# Altium PCB uku20710_face.PcbDoc
Units mm, origin at the board's own origin, x right, y up, seen from the top; angles counter-clockwise.
Board outline 354.7 x 156.7 mm, 2 copper layers (Top Layer, Bottom Layer); 59 components, 530 nets, 280 pads, 80 vias.
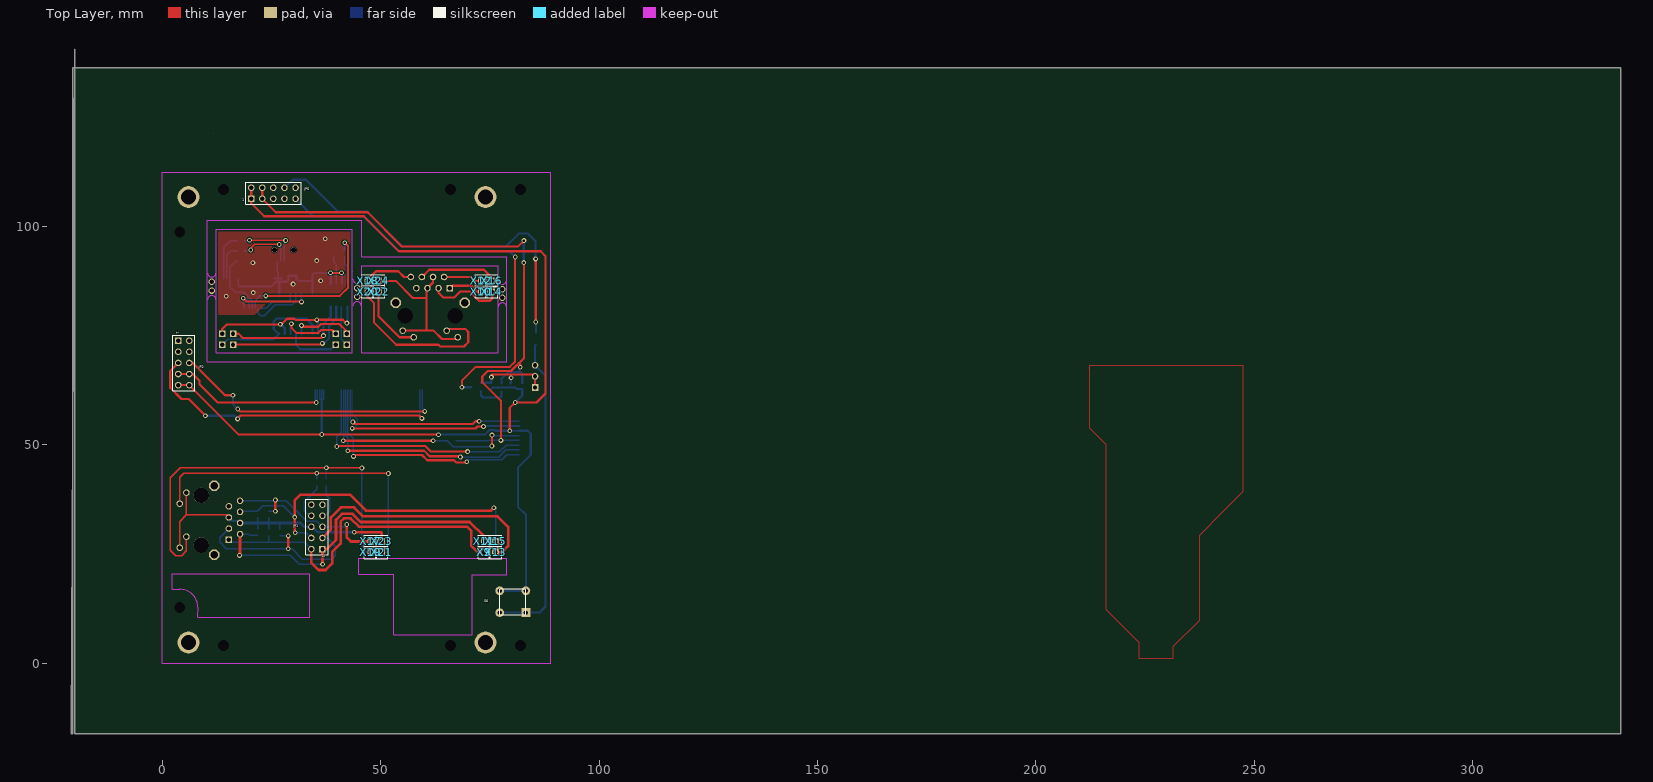
[diagram p0: Top Layer view]
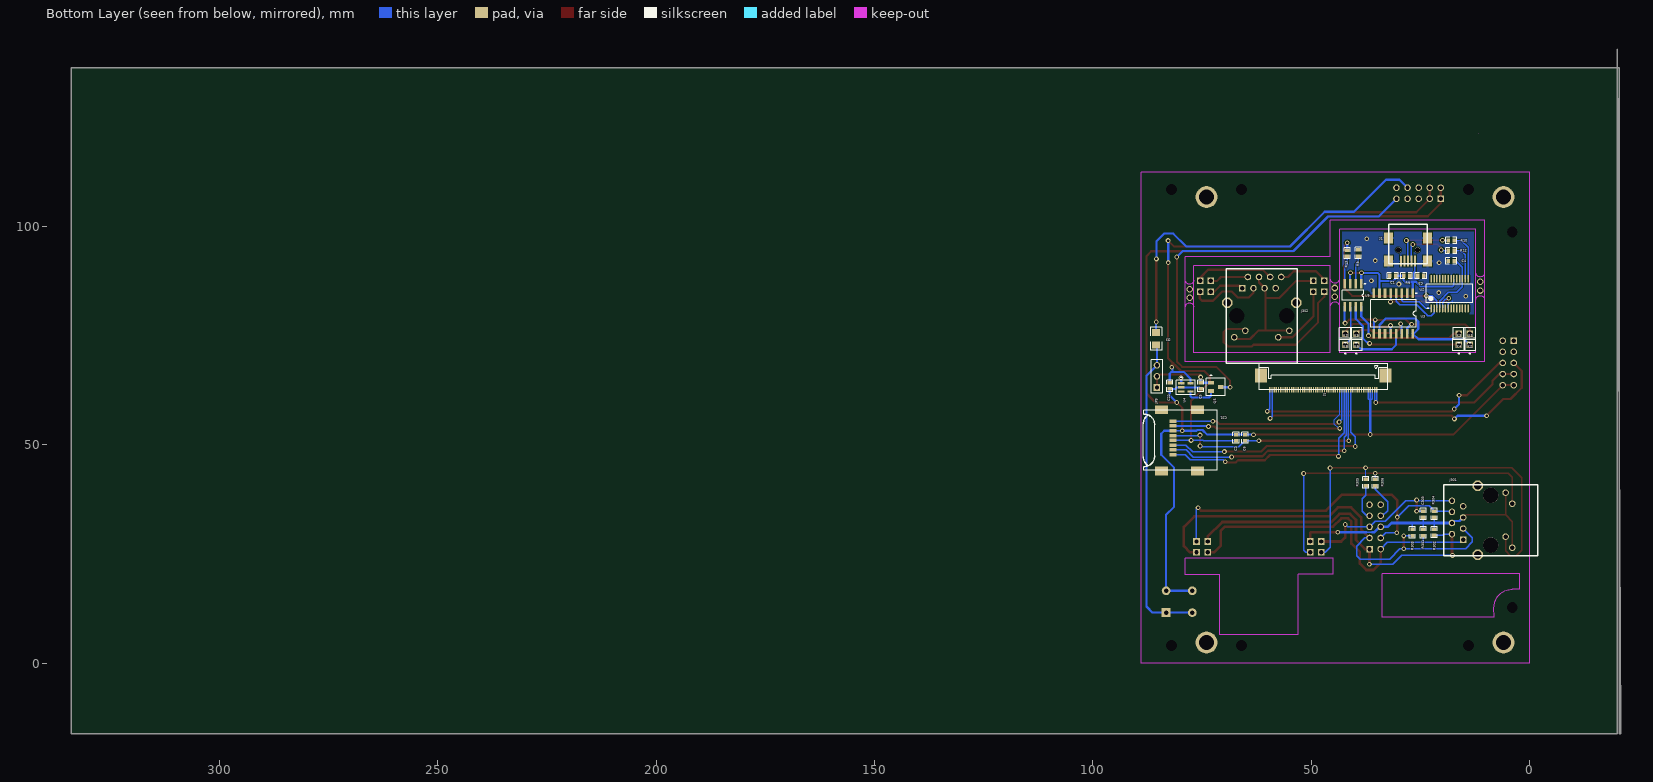
[diagram p1: Bottom Layer view, seen from below]

## Layer stack, top to bottom
Top Layer: signal copper 0.0356
Dielectric: dielectric 0.32, FR-4, Dk 4.8
Bottom Layer: signal copper 0.0356

## Board outline
-20.1,140.5 -20.1,-16.2 333.9,-16.2 333.9,136.35 -20.45,136.35 -20.45,-16.2 -20.8,-16.2

## Design rules (kind name [scope] priority, off if disabled: settings)
Clearance Keep_out_usb [OnLayer('Keep-Out Layer') vs InPoly and InNet(GND_USB)] p1: gap=0.3
Clearance Keep_out_poly [OnLayer('Keep-Out Layer') vs InPoly] p2: gap=1
Clearance Holes [InPoly vs HasPad('Free-0') Or HasPad('Free-1') Or HasPad('Free-2') Or HasPad('Free-3')] p3: gap=2
Clearance Keep_Out [OnLayer('Keep-Out Layer')] p4: gap=0.45
Clearance "Для разъёма и индикатора" [InComponent(JP5) or InComponent(U2)] p5: gap=0.3
Clearance [All] p6: gap=0.2
ComponentClearance [All] p1: gap=0.254 collisioncheckmode=0
HoleSize [All] p1: absolutevalues=TRUE maxlimit=5 minlimit=0.025 maxpercent=80.000 minpercent=20.000
PolygonConnect [InComponent(J1) and HasPad('J1-5')  or InComponent(U2)] p1: connectstyle=Relief reliefconductorwidth=0.3 reliefentries=4 polygonreliefangle="90 Angle"
PolygonConnect PolygonConnect_1 [All] p2: connectstyle=Relief reliefconductorwidth=0.5 reliefentries=4 polygonreliefangle="90 Angle"
RoutingLayers [All] p1: top layer=Horizontal bottom layer=Vertical
RoutingVias [All] p1: holewidth=0.7 width=1.2 viastyle="Through Hole" minholewidth=0.6 minwidth=1.1 maxholewidth=0.7 maxwidth=1.2
SolderMaskExpansion [All] p1: expansion=0.102
TestPointUsage [All] p1: valid=0 allowmultiple=FALSE
Testpoint [All] p1: side=15 testpointundercomponent=TRUE minsize=1.016 maxsize=2.54 preferedsize=1.524 minholesize=0 maxholesize=1.016 preferedholesize=0.813 testpointgrid=0.025 style=1023 order=1234567890
Width [All] p1: maxlimit=2 minlimit=0.2 preferedwidth=0.254 toplayer_prefwidth=0.5 bottomlayer_prefwidth=0.5 minimp=50.000000 maximp=50.000000 favimp=50.000000
15 further rules are at their usual default settings.

## Classes and differential pairs
component class USB: C1 C3 C4 J1 R8 R9 R10 R12 R13 U2 U3 U5 X1 X2 X3 X4 X5 X6 X7 X8
component class uku206: A? BT? C2 C5 C6 C22 CS1 D3 J2 JP2 JP5 JP9 Q5 S6 U4 UU1 UU3 UU5 UU7 UU9
component class LAN: C303 J301 J302 JP1 R301 R302 R303 R304 R305 R306 X9 X10 X11 X12 X13 X14 X15 X16 X17 X18 X19 X20 X21 X22 X23 X24

## Components (designator, comment, footprint, x,y, rotation, side; value= is the part's Value field where it differs from the comment)
C1 "1.0" _0603 31.375,88.7 r180 bottom
C2 "1.0" _0603 67.25,51.6 r270 bottom
C3 "1.0" _0603 24.925,88.65 r0 bottom
C4 "1.0" _0603 17.975,92.05 r180 bottom
C5 "1.0" _0603 75.325,63.475 r90 bottom
C6 "22pF" _0603 65.2,51.6 r270 bottom
C22 "1.0" _0603 82.425,63.475 r270 bottom (schematic designator C?)
C303 "0.1" _0603 24.4,34.1 r270 bottom
CS1 "MICROSD-ADAPTER" microsd_2 81.75,51 r270 bottom
D3 "LL4148" _1206d 85.55,74.25 r90 bottom
J1 "miniUSB" USBmini 27.875,100.45 r0 bottom
J2 "Edge Con 50" FH12-50 35,62.55 r0 bottom
J301 "J0011D21B" J0011D21B#1 8.902,32.708 r270 bottom
J302 "J0011D21B" J0011D21B#2 61.35,79.5 r0 bottom
JP1 "Header 10H" HDR2X5 36.676,26.1 r90 top
JP2 "PBD-10" HDR2X5 3.65,73.8 r270 top
JP5 "PLHD-20" HDR2X5 20.35,106.3 r0 top
JP9 "PLS-3" HDR1X3 85.35,63.1 r90 bottom
Q5 "IRLML2402" SO-G3 71.875,63.225 r270 bottom (schematic designator Q?)
R8 "200R" _0603 39.225,93.9 r270 bottom (schematic designator R?)
R9 "1R" _0603 28.175,88.7 r0 bottom
R10 "20R" _0603 17.975,96.75 r180 bottom
R12 "20R" _0603 17.975,94.45 r180 bottom
R13 "200R" _0603 41.775,93.85 r270 bottom
R301 "51R" _0603 24.4,29.9 r90 bottom
R302 "51R" _0603 21.85,29.95 r270 bottom
R303 "51R" _0603 26.85,29.9 r90 bottom
R304 "51R" _0603 21.85,34.1 r90 bottom
R305 "K10" _0603 37.55,41.35 r270 bottom
R306 "K10" _0603 35.35,41.35 r270 bottom
S6 "SWT-6" SWT-6 83.25,11.55 r180 top
U2 "FT232R" SOP65P780-28L 18.325,84.6 r90 bottom
U3 "ISO7231" SO-G16/D10.4 31.225,80.05 r0 bottom
U4 "TPS3823" SO-G5/P.95 78.725,63.125 r270 bottom (schematic designator U?)
U5 "MOCD217" SO-G8 40.475,84.2 r0 bottom
X1 "" PIN1#1 13.7,75.425 r0 bottom
X2 "" PIN1#1 13.7,72.925 r0 bottom
X3 "" PIN1#1 16.2,75.425 r0 bottom
X4 "" PIN1#1 16.2,72.925 r0 bottom
X5 "" PIN1#1 39.7,75.425 r0 bottom
X6 "" PIN1#1 39.7,72.925 r0 bottom
X7 "" PIN1#1 42.2,75.425 r0 bottom
X8 "" PIN1#1 42.2,72.925 r0 bottom
X9 "" PIN1#2 73.75,25.325 r90 top
X10 "" PIN1#2 73.05,85 r0 top
X11 "" PIN1#2 73.75,27.825 r90 top
X12 "" PIN1#2 73.025,87.5 r0 top
X13 "" PIN1#2 76.3,25.325 r90 top
X14 "" PIN1#2 75.45,85 r0 top
X15 "" PIN1#2 76.3,27.825 r90 top
X16 "" PIN1#2 75.45,87.505 r0 top
X17 "" PIN1#2 47.7,27.825 r90 top
X18 "" PIN1#2 47.025,87.55 r0 top
X19 "" PIN1#2 47.7,25.325 r90 top
X20 "" PIN1#2 47.02,85.062 r0 top
X21 "" PIN1#2 50.25,25.325 r90 top
X22 "" PIN1#2 49.525,85.05 r90 top
X23 "" PIN1#2 50.25,27.825 r90 top
X24 "" PIN1#2 49.5,87.5 r0 top

## Footprints (in the part's own frame and the unit in brackets; to place one, negate y for a bottom-side part, rotate by r counter-clockwise, add the part's x,y. Pads: shape width x height; smd on the part's side, far side on the other; paste and mask are expansions set on the pad)
_0603 [mm]
  rect 0.8x1 smd: 1(-0.7,0) 2(0.7,0)
  silkscreen extent -1.3,-0.7 1.3,0.7
_1206d [mm]
  rect 1.6x1.8 smd: 1(1.405,0.012) 2(-1.395,0.012)
  silkscreen extent -2.6,-1.29 2.6,1.31
FH12-50 [mm]
  rect 2.8x3.2 smd: 0(-2,-3.25) 0(26.5,-3.25)
  rect 0.3x1.3 smd: 1(0,0) 2(0.5,0) 3(1,0) 4(1.5,0) 5(2,0) 6(2.5,0) 7(3,0) 8(3.5,0) 9(4,0) 10(4.5,0) 11(5,0) 12(5.5,0) 13(6,0) 14(6.5,0) 15(7,0) 16(7.5,0) 17(8,0) 18(8.5,0) 19(9,0) 20(9.5,0) 21(10,0) 22(10.5,0) 23(11,0) 24(11.5,0) 25(12,0) 26(12.5,0) 27(13,0) 28(13.5,0) 29(14,0) 30(14.5,0) 31(15,0) 32(15.5,0) 33(16,0) 34(16.5,0) 35(17,0) 36(17.5,0) 37(18,0) 38(18.5,0) 39(19,0) 40(19.5,0) 41(20,0) 42(20.5,0) 43(21,0) 44(21.5,0) 45(22,0) 46(22.5,0) 47(23,0) 48(23.5,0) 49(24,0) 50(24.5,0)
  silkscreen extent -2.55,-6.02 27.05,0
HDR1X3 [mm]
  rect 1.5x1.5 hole 1: 1(0,0)
  round 1.5 hole 1: 2(2.54,0) 3(5.08,0)
  silkscreen extent -1.27,-1.27 6.35,1.27
HDR2X5 [mm]
  rect 1.5x1.5 hole 1: 1(0,0)
  round 1.5 hole 1: 2(0,2.54) 3(2.54,0) 4(2.54,2.54) 5(5.08,0) 6(5.08,2.54) 7(7.62,0) 8(7.62,2.54) 9(10.16,0) 10(10.16,2.54)
  silkscreen extent -1.27,-1.27 11.43,3.81
J0011D21B#1 [mm]
  round 2.5 hole 1.8: 0(-7.9,-3) 0(7.9,-3)
  round 3.5 hole 3.5: 0(-5.7,0) 0(5.7,0)
  rect 1.5x1.5 hole 1: 1(4.445,-6.35)
  round 1.5 hole 1: 2(3.175,-8.9) 3(1.905,-6.35) 4(0.635,-8.9) 5(-0.635,-6.35) 6(-1.905,-8.9) 7(-3.175,-6.35) 8(-4.445,-8.9) 9(6.31,4.9) 10(3.77,3.38) 11(-3.8,4.9) 12(-6.31,3.38)
  silkscreen extent -8.1,-10.8 8.1,10.8
J0011D21B#2 [mm]
  round 2.5 hole 1.8: 0(-7.9,-3) 0(7.9,-3)
  round 1.5 hole 3.5: 0(-5.7,0) 0(5.7,0)
  rect 1.5x1.5 hole 1: 1(4.445,-6.35)
  round 1.5 hole 1: 2(3.175,-8.9) 3(1.905,-6.35) 4(0.635,-8.9) 5(-0.635,-6.35) 6(-1.905,-8.9) 7(-3.175,-6.35) 8(-4.445,-8.9) 9(6.31,4.9) 10(3.77,3.38) 11(-3.8,4.9) 12(-6.31,3.38)
  silkscreen extent -8.1,-10.8 8.1,10.8
microsd_2 [mm]
  rect 2x3 smd: 0(-7,-2.6) 0(-7,5.7) 0(7,-2.6) 0(7,5.7)
  rect 0.8x1.6 smd: 1(3.306,0.03) 2(2.206,0.03) 3(1.105,0.03) 4(0.005,0.03) 5(-1.095,0.03) 6(-2.194,0.03) 7(-3.294,0.03) 8(-4.394,0.03)
  silkscreen extent -6.88,-6.75 6.88,10.15
PIN1#1 [mm]
  rect 1.5x1.5 hole 1: 1(0,0)
  silkscreen extent -1.4,-1.4 1.4,2.17
PIN1#2 [mm]
  rect 1.5x1.5 hole 1: 1(0.012,0.005)
  silkscreen extent -1.39,-1.4 1.41,1.4
SO-G3 [mm]
  rect 0.85x1.3 smd: 1(-0.948,-1.102) 2(0.952,-1.102) 3(0.002,1.098)
  silkscreen extent -2.77,-2.15 2,2.15
SO-G5/P.95 [mm]
  rect 0.55x1.45 smd: 1(-0.95,-1.075) 2(0,-1.075) 3(0.95,-1.075) 4(0.95,1.075) 5(-0.95,1.075)
  silkscreen extent -2.42,-2.2 1.65,2.2
SO-G8 [mm]
  rect 0.6x2.2 smd: 1(-1.902,-2.611) 2(-0.632,-2.611) 3(0.638,-2.611) 4(1.908,-2.611) 5(1.908,2.589) 6(0.638,2.589) 7(-0.632,2.589) 8(-1.902,2.589)
  silkscreen extent -2.88,-2.74 2.5,1.09
SO-G16/D10.4 [mm]
  rect 0.6x2.15 smd: 1(-4.445,-4.625) 2(-3.175,-4.625) 3(-1.905,-4.625) 4(-0.635,-4.625) 5(0.635,-4.625) 6(1.905,-4.625) 7(3.175,-4.625) 8(4.445,-4.625) 9(4.445,4.625) 10(3.175,4.625) 11(1.905,4.625) 12(0.635,4.625) 13(-0.635,4.625) 14(-1.905,4.625) 15(-3.175,4.625) 16(-4.445,4.625)
  silkscreen extent -5.42,-4.75 5.2,3.15
SOP65P780-28L [mm]
  oval 1.8x0.35 smd: 1(-3.396,4.231) 2(-3.396,3.581) 3(-3.396,2.931) 4(-3.396,2.281) 5(-3.396,1.631) 6(-3.396,0.981) 7(-3.396,0.331) 8(-3.396,-0.319) 9(-3.396,-0.969) 10(-3.396,-1.619) 11(-3.396,-2.269) 12(-3.396,-2.919) 13(-3.396,-3.569) 14(-3.396,-4.219) 15(3.404,-4.219) 16(3.404,-3.569) 17(3.404,-2.919) 18(3.404,-2.269) 19(3.404,-1.619) 20(3.404,-0.969) 21(3.404,-0.319) 22(3.404,0.331) 23(3.404,0.981) 24(3.404,1.631) 25(3.404,2.281) 26(3.404,2.931) 27(3.404,3.581) 28(3.404,4.231)
  silkscreen extent -3.52,-5.29 2.1,5.31
SWT-6 [mm]
  rect 2x2 hole 1: 1(-0.009,-0.001)
  round 2 hole 1: 1(5.991,-0.001) 2(-0.009,-5.001) 2(5.991,-5.001)
  silkscreen extent -0.01,-5.5 5.99,0.5
USBmini [mm]
  round 1.2 hole 1.2: 0(-2.2,5.85) 0(2.2,5.85)
  rect 0.5x2.5 smd: 1(-1.6,8.43) 2(-0.8,8.43) 3(0,8.43) 4(0.8,8.43) 5(1.6,8.45)
  rect 2x2.5 smd: 6(-4.45,3.158) 6(-4.45,8.43) 6(4.45,3.158) 6(4.45,8.43)
  silkscreen extent -4.45,0 4.45,9

## Part data
C1 C3 C4 C303: library part "Cap Semi", "Capacitor (Semiconductor SIM Model)"
C2 C5 C6 C22: library part "Cap Semi", "Capacitor"
D3: library part Diode, "Default Diode"
J1: library part "Header 6", "Header, 6-Pin"
J2: "50-Pin Edge Connector"
JP1: "Header, 10-Pin, Right Angle"
JP2 JP5: library part "Header 5X2", "Header, 5-Pin, Dual row"
JP9: library part "Header 3", "Header, 3-Pin"
Q5: "HEXFET Power MOSFET"
R8 R9 R10 R12 R13: library part RES
R301 R302 R303 R304 R305 R306: library part Res2, "Resistor"
S6: library part SWT-9, "Switch"
U4: "Reset IC"
U5: library part F00817ASD
X1 X2 X3 X4 X5 X6 X7 X8 X9 X10 X11 X12 X13 X14 X15 X16 X17 X18 X19 X20 X21 X22 X23 X24: library part Socket, "Socket"

## Free pads (board coordinates)
  round 5 hole 3.5: 0(6,4.7) 0(6,106.7) 0(74,4.7) 0(74,106.7)
  round 2 hole 2.5: 26(14,4) 27(66,4) 28(82,4) 29(82,108.4) 30(66,108.4) 31(14,108.4) 32(4,98.7) 33(4,12.7)

## Via types
v1: diameter 1.1, hole 0.6, Top Layer to Bottom Layer, 74 vias
v2: diameter 1.5, hole 1, Top Layer to Bottom Layer, 6 vias

## Nets (pads, with @x,y where several pads share a name; then routed paths per layer and width w, separated by ;. In a path a pad name is that pad's centre, name@x,y a point inside that pad or via, vN(x,y) a via of type N, cw(c..) or ccw(c..) an arc to the next point about the centre after c; other vN are vias at no path point)
+1.8V: 
+3.3V: 
+3V3: 
+5V: 
+5V_IZ: 
+IAKB1: 
+IAKB2: 
+UOUT: 
-5V: 
-5V_IZ: 
-IAKB1: 
-IAKB2: 
-UOUT: 
BAT: 
CANH: 
CANL: 
DB0: 
DB1: 
DB2: 
DB3: 
DB4: JP5.9 Q5.3 | length 97.4
  Top Layer w0.5: v1(68.6,63.15) 68.6,64.625 71.8,67.825 79.575,67.825 80.775,69.025 v1@80.775,92.975
  Bottom Layer w0.5: JP5.9 34.56,102.25 46.2,102.25 54.1,94.35 79.425,94.35 v1(80.8,92.975) ; v1(68.6,63.15) 70.704,63.15 Q5.3
DB5: 
DB6: 
DB7: 
DT1: 
DT2: 
DT3: 
DT4: 
DT5: 
GND_P: 
GND_USB: C1.1 C3.1 C4.1 J1.5 J1.6 R8.1 U2.7 U2.18 U2.21 U2.25 U2.26 U3.2 U3.8 | length 1.8
  Bottom Layer w0.3: 17.675,82.847 17.903,82.847 ; 18.034,82.716 18.034,82.747 ; 18.225,82.547 18.513,82.547 18.656,82.404 ; U2.7 18.656,82.275
  other v1: 14.625,83.975 20.825,84.825 29.95,86.775 36.25,87.547 20.75,91.647 35.35,92.147 37.325,97.175
NetA1_1: 
NetA1_2: 
NetBT2_1: 
NetBT2_2: 
NetBT700_1: 
NetC1_2: C1.2 R9.2 U2.20 U3.1 U3.7 U5.1 U5.3 | length 40
  Top Layer w0.5: v1(38.525,89.35) v1(41.025,89.35)
  Bottom Layer w0.3: U2.20 17.35,87.998 17.35,86.55 17.7,86.2
  Bottom Layer w0.5: 17.7,86.2 24.925,86.2 26.025,87.3 28.575,87.3 28.875,87.6 R9.2 C1.2 30.675,88.05 31.25,87.475 34.4,87.475 ; U3.1 26.78,87.28 26.8,87.3 ; U3.7 34.4,87.475 ; U5.1 38.573,89.273 38.495,89.35 34.825,89.35 34.4,88.925 34.4,87.475 ; v1(41.025,89.35) 41.113,89.262 U5.3
NetC2_1: C2.1 C5.1 C6.1 C22.2 CS1.6 J2.3 J2.4 J2.5 JP2.9 JP2.10 JP5.1 JP5.2 S6.2 U4.2 | length 279
  Top Layer w0.5: JP2.9 JP2.10 17.53,52.3 v1(63.25,52.3) ; JP5.2 20.35,105.275 23.325,102.3 46.15,102.3 54.175,94.275 86.65,94.275 87.75,93.175 87.75,61.725 85.7,59.675 v1(80.825,59.675) 79.575,58.425 v1(79.575,53.175)
  Bottom Layer w0.3: J2.3 36,60.475 36.075,60.4 36.95,60.4 37,60.45 J2.5 ; 36.5,60.4 J2.4 ; v1@79.575,53.194 CS1.6 ; C22.2@82.425,62.675 C22.2
  Bottom Layer w0.5: v1(36.5,52.325) 36.5,60.3 ; v1(63.25,52.3) 73.85,52.3 74.9,53.35 76.15,53.35 76.325,53.175 v1(79.575,53.175) ; C5.1 75.675,63.125 80.8,63.125 81.15,62.775 C22.2 82.425,61.275 v1(80.825,59.675) v1@80.85,59.675 ; S6.2@77.259,16.551 83.259,16.551 83.259,33.991 81.425,35.825 81.425,44.75 84.375,47.7 84.375,52.525 83.706,53.194 CS1.6
NetC2_2: C2.2 C22.1 CS1.4 JP5.3 JP5.4 U4.5 | length 147.5
  Top Layer w0.5: JP5.4 JP5.3 25.965,103.225 47.025,103.225 54.9,95.35 81.425,95.35 v1(82.8,96.725) ; v1(77.525,50.995) 77.525,60.05 73.275,64.3 73.275,65.6 74.55,66.875 79.85,66.875 82.8,69.825 v1@82.8,91.7 ; 81.625,68.675 81.975,68.325 v1(81.975,67.725)
  Bottom Layer w0.3: C2.2 74.7,50.9 74.794,50.995 CS1.4
  Bottom Layer w0.5: U4.5 77.65,65.1 79.225,66.675 82,66.675 82.425,66.25 C22.1 ; 81.8,66.675 81.8,67.55 v1(81.975,67.725) ; v1(82.775,91.7) 82.775,96.7 v1(82.8,96.725)
NetC3_2: C3.2 J1.1 R9.1 | length 5.9
  Bottom Layer w0.3: J1.1 26.275,89.7 26.55,89.425 26.55,88.05
  Bottom Layer w0.5: 25.625,88.05 27.425,88.05
NetC4_2: C4.2 U2.4 U2.17 | length 15.2
  Bottom Layer w0.3: C4.2 16.825,92.05 15.406,90.631 15.406,86.169 16.675,84.9 18.6,84.9 20.606,82.894 U2.4
NetC5_2: C5.2 JP9.1 JP9.2 Q5.1 U4.1 | length 18.3
  Top Layer w0.5: v1@75.475,65.35 v1(75.35,65.475) 75.35,65.875 75.55,66.075 84.915,66.075 JP9.2 JP9.1
  Bottom Layer w0.5: Q5.1 C5.2 C5.2 75.35,64.2 v1(75.35,65.475) ; U4.1 79.8,65.275 v1(79.875,65.35)
NetC6_2: C6.2 CS1.5 J2.14 | length 55.1
  Top Layer w0.5: v1(41.425,50.925) 41.45,50.9 v1(62,50.9) ; v1(75.475,49.7) 75.5,49.725 v1(75.5,52.2)
  Bottom Layer w0.3: v1(41.425,50.925) 41.5,51 J2.14 ; v1(62,50.9) C6.2 66.575,49.525 75.3,49.525 v1(75.475,49.7) ; v1(75.5,52.2) 75.606,52.095 CS1.5
NetC11_1: 
NetC11_2: 
NetC12_2: 
NetC14_2: 
NetC21_1: 
NetC23_1: 
NetC33_1: 
NetC35_2: 
NetC36_2: 
NetC50_2: 
NetC51_2: 
NetC52_2: 
NetC53_2: 
NetC61_1: 
NetC61_2: 
NetC62_2: 
NetC63_2: 
NetC66_1: 
NetC303_1: C303.1 J301.8 JP1.5 X17.1 | length 40.1
  Top Layer w0.6: v1(25.9,34.75) v1(25.9,37.35) ; v1(42.25,31.725) 42.25,28.75 43.163,27.837 X17.1
  Bottom Layer w0.3: J301.8 28.372,37.153 33.025,32.5 35.356,32.5 JP1.5 41.705,31.18 v1(42.25,31.725) ; C303.1 25.85,34.8 v1(25.9,34.75)
NetC303_2: C303.2 J301.4 J301.5 J301.9 J301.12 JP1.6 R301.2 R302.1 R303.2 R304.1 X23.1 | length 68.5
  Top Layer w0.3: J301.9@3.975,26.35 3.975,32.375 5.522,33.922 ; J301.12 5.522,33.922 ; J301.5 14.673,33.922 5.522,33.922
  Top Layer w0.6: v1(43.95,29.95) 50.1,29.95 50.245,29.805 X23.1
  Bottom Layer w0.3: R302.1 R304.1 ; R301.2 C303.2 ; R303.2 26.85,32.023 26.9,32.073
  Bottom Layer w0.4: 36.05,29.95 37.45,29.95
  Bottom Layer w0.5: J301.5 16.07,32.525 17.35,32.525 J301.4
  Bottom Layer w0.6: J301.4 31.652,32.073 32.545,31.18 JP1.6 ; JP1.6@34.395,31.18 35.625,29.95 36.05,29.95 ; 37.45,29.95 v1(43.95,29.95)
NetC500_2: 
NetC502_1: 
NetC502_2: 
NetC505_1: 
NetC505_2: 
NetC508_1: 
NetC510_1: 
NetC511_1: 
NetC511_2: 
NetC512_2: 
NetC513_2: 
NetC514_1: 
NetC516_1: 
NetC516_2: 
NetC517_1: 
NetC700_1: 
NetC700_2: 
NetC701_1: 
NetC702_1: 
NetC704_2: 
NetC705_2: 
NetC706_1: 
NetC707_1: 
NetC707_2: 
NetC709_1: 
NetC709_2: 
NetC710_1: 
NetC713_1: 
NetC714_1: 
NetC715_1: 
NetCS1_1: CS1.1 J2.16 | length 55.3
  Top Layer w0.5: v1(43.775,47.325) 44.075,47.625 59.475,47.625 60.675,46.425 66.825,46.425 67.35,45.9 69.525,45.9 v1(69.725,46.1)
  Bottom Layer w0.3: J2.16 42.5,52.775 43.775,51.5 v1(43.775,47.325) ; v1(69.725,46.1) 70.15,46.525 77.75,46.525 78.919,47.694 CS1.1
NetCS1_2: CS1.2 J2.15 | length 54.7
  Top Layer w0.5: v1(42.475,48.6) 59.95,48.6 61.175,47.375 68.05,47.375 v1(68.25,47.175)
  Bottom Layer w0.3: J2.15 42,52.15 42.475,51.675 v1(42.475,48.6) ; v1(68.25,47.175) 77,47.175 78.619,48.794 CS1.2
NetCS1_3: CS1.3 J2.13 | length 56.4
  Top Layer w0.5: v1(39.95,49.6) 40.05,49.7 60.225,49.7 61.5,48.425 v1(69.9,48.425)
  Bottom Layer w0.3: v1(39.95,49.6) 39.95,51.85 41,52.9 J2.13 ; v1(69.9,48.425) 69.95,48.375 77.2,48.375 78.719,49.895 CS1.3
NetCS1_7: CS1.7 J2.18 | length 48.5
  Top Layer w0.5: v1(43.5,53.725) 71.725,53.725 72.175,54.175 v1(73.55,54.175)
  Bottom Layer w0.25: v1(43.5,53.725) 43.775,53.725 44.775,54.725 44.775,55.75 43.5,57.025 J2.18
  Bottom Layer w0.5: v1(73.55,54.175) 73.669,54.294 CS1.7
NetCS1_8: CS1.8 J2.17 | length 46.1
  Top Layer w0.5: v1(43.65,55.2) 44.075,54.775 71.125,54.775 71.725,55.375 v1(72.55,55.375)
  Bottom Layer w0.3: J2.17 43,55.85 v1(43.65,55.2) ; v1(72.55,55.375) 81.701,55.375 CS1.8
NetD3_1: D3.1 JP5.8 | length 87.5
  Top Layer w0.5: v1(85.525,78.1) v1@85.525,92.55
  Bottom Layer w0.5: JP5.8 29.805,110.675 32.9,110.675 40.25,103.325 46.95,103.325 54.9,95.375 78.675,95.375 81.625,98.325 83.75,98.325 85.475,96.6 v1(85.475,92.55) ; v1(85.525,78.1) 85.562,78.063 D3.1
NetD3_2: D3.2 JP9.3 S6.1 | length 72.1
  Bottom Layer w0.5: S6.1@77.259,11.551 86.351,11.551 87.75,12.95 87.75,65.78 JP9.3 85.35,72.642 D3.2
NetD5_1: 
NetD20_2: 
NetD500_1: 
NetD500_2: 
NetD501_1: 
NetD503_1: 
NetD505_1: 
NetD505_2: 
NetD506_1: 
NetD700_1: 
NetD701_1: 
NetD702_1: 
NetD703_2: 
NetD704_1: 
NetD705_1: 
NetD706_1: 
NetFU500_1: 
NetFU700_1: 
NetFU700_2: 
NetJ1_2: J1.2 R12.1 | length 12.9
  Top Layer w0.3: v1(20.275,94.575) 20.275,94.975 21.15,95.85 v1(26.8,95.85)
  Bottom Layer w0.3: R12.1 20.15,94.45 v1(20.275,94.575) ; v1(26.8,95.85) 27.075,95.575 J1.2
NetJ1_3: J1.3 R10.1 | length 14.5
  Top Layer w0.3: v1(19.975,96.8) 28.175,96.8 v1(28.225,96.75)
  Bottom Layer w0.3: R10.1 19.925,96.75 v1(19.975,96.8) ; J1.3 27.875,96.4 v1(28.225,96.75)
NetJ2_1: J2.1 J2.2 JP2.7 JP2.8 | length 41.1
  Top Layer w0.5: JP2.7 6.945,66.18 8.5,64.625 8.5,63.875 12.7,59.675 v1(35.25,59.675)
  Bottom Layer w0.3: J2.1 35,59.625 35.05,59.675 35.5,59.675 J2.2
NetJ2_2: 
NetJ2_3: 
NetJ2_4: 
NetJ2_5: pad.30
NetJ2_49: J2.49 JP2.5 | length 74.4
  Top Layer w0.5: JP2.5 1.825,66.895 1.825,63.05 4.4,60.475 6.025,60.475 v1(9.875,56.625) ; v1(17.25,55.9) 17.25,56.025 17.9,56.675 58.8,56.675 v1(59.45,56.025)
  Bottom Layer w0.3: J2.49 59,56.475 v1(59.45,56.025)
  Bottom Layer w0.5: v1(9.875,56.625) 16.525,56.625 v1(17.25,55.9)
NetJ2_50: J2.50 JP2.6 | length 64.8
  Top Layer w0.5: JP2.6 6.98,68.72 14.375,61.325 v1(16.175,61.325) ; v1(17.275,58.175) 17.825,57.625 v1(60.075,57.625)
  Bottom Layer w0.3: J2.50 59.5,58.2 v1(60.075,57.625)
  Bottom Layer w0.5: v1(16.175,61.325) 16.175,59.275 v1(17.275,58.175)
NetJ301_1: J301.1 JP1.2 R301.1 X9.1 | length 79.4
  Top Layer w0.6: JP1.2 34.136,22.939 35.775,21.3 37.4,21.3 38.875,22.775 38.875,25.375 40.85,27.35 40.85,32.4 41.6,33.15 43.15,33.15 45.05,31.25 69.775,31.25 70.725,30.3 70.725,26.925 72.313,25.337 X9.1
  Bottom Layer w0.3: J301.1 15.89,27.625 32.611,27.625 JP1.2 ; R301.1 24.4,27.725 24.5,27.625
NetJ301_2: J301.2 JP1.1 R302.2 X11.1 | length 78.8
  Top Layer w0.6: v1(17.675,24.65) 17.802,24.777 J301.2 ; v1(36.7,22.625) 36.676,22.649 JP1.1 37.7,26.1 39.775,28.175 39.775,32.8 41.125,34.15 43.575,34.15 45.425,32.3 70.375,32.3 73.745,28.93 X11.1
  Bottom Layer w0.3: v1(17.675,24.65) 29.3,24.65 31.325,22.625 v1(36.7,22.625) ; J301.2 19.692,29.533 19.975,29.25 R302.2
NetJ301_3: J301.3 JP1.3 R303.1 X13.1 | length 100
  Top Layer w0.6: v1(28.85,26.175) v1(28.85,29.125) ; JP1.3 38.6,30.564 38.6,33.35 40.9,35.65 43.925,35.65 46,33.575 76.775,33.575 79.2,31.15 79.2,26.775 77.762,25.337 X13.1
  Bottom Layer w0.3: J301.3 13.125,28.676 13.125,27.725 14.675,26.175 29.75,26.175 32.1,23.825 38.8,23.825 39.575,24.6 39.575,26.8 37.735,28.64 JP1.3 ; R303.1 26.925,29.125 v1(28.85,29.125)
NetJ301_6: J301.6 JP1.4 R304.2 X15.1 | length 81.7
  Top Layer w0.6: v1(30.45,29.825) 30.325,29.95 30.325,37.2 31.675,38.55 42.975,38.55 46.625,34.9 75.275,34.9 v1(75.925,35.55)
  Bottom Layer w0.3: J301.6 17.989,34.8 R304.2 21.85,34.9 22.975,36.025 27.725,36.025 v1(30.325,33.425) ; v1(30.45,29.825) 32.951,29.825 JP1.4 ; v1(75.925,35.55) 76.295,35.18 X15.1
NetJ301_10: J301.10 R305.1 X19.1 | length 92.5
  Top Layer w0.3: J301.10 5.522,25.722 4.4,24.6 3.075,24.6 1.875,25.8 1.875,42.4 4.15,44.675 v1(45.7,44.675)
  Bottom Layer w0.25: R305.1 37.55,44.675 v1(37.575,44.7)
  Bottom Layer w0.3: v1(45.7,44.675) 45.7,26.475 46.838,25.337 X19.1
NetJ301_11: J301.11 R306.1 X21.1 | length 75
  Top Layer w0.3: J301.11 4.002,42.552 4.925,43.475 51.7,43.475 v1(51.775,43.4)
  Bottom Layer w0.3: R306.1 v1(35.35,43.475) ; X21.1 51.287,25.337 51.775,25.825 v1(51.775,43.4)
NetJ302_1: J302.1 X10.1 | length 8.2
  Top Layer w0.5: J302.1 65.9,85.85 66.45,86.4 70.85,86.4 72.35,84.9 X10.1@73.1,84.9
NetJ302_2: J302.2 X12.1 | length 8.9
  Top Layer w0.5: J302.2 70.675,88.4 71.57,87.505 X12.1
NetJ302_3: J302.3 X14.1 | length 17
  Top Layer w0.5: J302.3 63.255,84.795 64.35,83.7 66.825,83.7 68.2,85.075 70.4,85.075 72.525,82.95 75.025,82.95 75.562,83.487 X14.1@75.562,85.005
NetJ302_4: J302.4 J302.5 J302.9 J302.12 X24.1 | length 39.1
  Top Layer w0.5: X24.1 53.445,87.505 57.35,83.6 60.5,83.6 ; J302.12 62.13,76.12 64.05,74.2 67.26,74.2 J302.9 ; 60.395,76.12 60.5,76.225 60.5,85.635 61.985,87.12 J302.4
NetJ302_6: J302.6 X16.1 | length 18.2
  Top Layer w0.5: J302.6 61.095,90.05 73.65,90.05 75.512,88.188 X16.1@75.512,87.505
NetJ302_8: J302.8 X18.1 | length 11.5
  Top Layer w0.5: X18.1 47.037,87.837 48.925,89.725 54.025,89.725 55.35,88.4 J302.8
NetJ302_10: J302.10 X20.1 | length 39.7
  Top Layer w0.5: X20.1@47.02,85.062 47.02,83.88 48.5,82.4 48.5,77.95 53.575,72.875 63.25,72.875 63.65,72.475 69.075,72.475 70.075,73.475 70.075,75.8 69.35,76.525 65.525,76.525 J302.10
NetJ302_11: J302.11 X22.1 | length 15.7
  Top Layer w0.5: X22.1 49.52,79.405 54.325,74.6 J302.11
NetJP1_7: JP1.7 R305.2 | length 8.4
  Bottom Layer w0.3: JP1.7@36.575,33.775 37.325,33.775 38.35,34.8 38.35,37.575 37.55,38.375 R305.2
NetJP1_8: JP1.8 R306.2 | length 9
  Bottom Layer w0.3: JP1.8 33.73,33.72 32.55,34.9 32.55,36.975 35.35,39.775 R306.2
NetJP1_9: 
NetJP3_3: 
NetJP3_3: 
NetJP5_5: 
NetJP5_6: pad.31
NetJP5_7: 
NetJP5_10: 
NetJP5_11: 
NetJP5_12: 
NetJP11_1: 
NetQ2_1: 
NetQ2_3: 
NetQ4_1: 
NetQ5_2: Q5.2 U4.4 | length 7
  Bottom Layer w0.5: Q5.2 72.977,61.273 73.425,60.825 77.35,60.825 77.65,61.125 U4.4
NetQ6_1: 
NetQ7_2: 
NetQ7_4: 
NetQ8_2: 
NetQ8_4: 
NetQ9_2: 
NetQ9_4: 
NetQ10_1: 
NetQ10_3: 
NetQ10_3: 
NetQ11_1: 
NetQ11_1: 
NetQ11_3: 
NetQ500_1: 
NetQ501_1: 
NetQ700_1: 
NetQ700_3: 
NetR3_1: 
NetR3_2: 
NetR3_2: 
NetR3_2: 
NetR3_2: 
NetR3_2: 
NetR3_2: 
NetR3_2: 
NetR4_2: 
NetR5_2: 
NetR6_2: 
NetR7_2: 
NetR7_2: 
NetR8_1: 
NetR8_1: 
NetR8_2: R8.2 U5.2 | length 6.6
  Bottom Layer w0.3: R8.2 39.225,91.925 39.843,91.307 U5.2
NetR8_2: 
NetR8_2: 
NetR10_2: R10.2 U2.15 | length 11
  Bottom Layer w0.3: U2.15 14.106,95.231 15.625,96.75 R10.2
NetR12_2: R12.2 U2.16 | length 8.4
  Bottom Layer w0.3: U2.16 14.756,93.456 15.75,94.45 R12.2
NetR13_1: R13.1 U2.3 | length 36.6
  Top Layer w0.5: v1(23.7,84.075) 40.65,84.075 42.5,85.925 42.5,95.525 v1(41.775,96.25)
  Bottom Layer w0.3: U2.3 21.256,82.981 22.35,84.075 v1(23.7,84.075)
  Bottom Layer w0.5: R13.1 v1(41.775,96.25)
NetR13_2: R13.2 U5.4 | length 6.6
  Bottom Layer w0.3: R13.2 41.775,91.475 42.383,90.867 U5.4
NetR14_2: 
NetR20_1: 
NetR22_2: 
NetR22_2: 
NetR22_2: 
NetR22_2: 
NetR22_2: 
NetR22_2: 
NetR22_2: 
NetR22_2: 
NetR22_2: 
NetR25_1: 
NetR30_2: 
NetR38_1: 
NetR42_1: 
NetR42_2: 
NetR43_1: 
NetR43_2: 
NetR43_2: 
NetR44_1: 
NetR44_2: 
NetR44_2: 
NetR45_2: 
NetR49_1: 
NetR49_2: 
NetR51_1: 
NetR51_2: 
NetR52_1: 
NetR53_1: 
NetR57_1: 
NetR60_1: 
NetR69_2: 
NetR83_1: 
NetR86_1: 
NetR95_1: 
NetR96_2: 
NetR112_1: 
NetR113_1: 
NetR114_1: 
NetR115_1: 
NetR116_1: 
NetR117_2: 
NetR120_1: 
NetR305_2: 
NetR306_2: 
NetR504_1: 
NetR505_2: 
NetR505_2: 
NetR510_1: 
NetR702_2: 
NetR704_2: 
NetR705_1: 
NetS2_1: 
NetU1_1: 
NetU1_4: 
NetU1_5: 
NetU2_1: U2.1 U3.3 | length 9.2
  Bottom Layer w0.3: U2.1 23.779,81.204 25.275,82.7 29,82.7 29.32,83.02 U3.3
NetU2_2: U2.2 U3.4 | length 13
  Bottom Layer w0.3: U2.2@21.9,81.1 21.9,80.2 22.525,79.575 23.4,79.575 25.85,82.025 29.775,82.025 30.59,82.84 U3.4
NetU2_5: U2.5 U3.5 | length 18.5
  Top Layer w0.5: v1@18.7,83.425 19.25,82.775 31.8,82.775 v1(31.875,82.7)
  Bottom Layer w0.3: v1@18.7,83.425 18.775,83.25 19.3,83.25 19.956,82.594 U2.5 ; U3.5 31.86,82.715 v1(31.875,82.7)
  other v1: 18.55,83.55
NetU3_9: U3.9 U3.15 U5.5 X1.1 | length 40.8
  Top Layer w0.5: X1.1 13.7,76.475 14.75,77.525 27.25,77.525 27.262,77.538 28.575,78.85 30.2,78.85 30.475,78.575 v1@35.675,78.575 ; v1@35.675,78.6 41.3,78.6 42.05,77.85 v1(42.275,77.85)
  Bottom Layer w0.5: v1@27.05,77.75 27.2,77.6 27.2,77.55 28.05,76.7 U3.15 ; U3.9 35.67,78.595 v1@35.675,78.6 ; v1(42.275,77.85) 42.383,77.958 U5.5
  other v1: 27.05,77.6 35.35,78.575
NetU3_10: U3.10 U3.16 X2.1 | length 29.3
  Bottom Layer w0.3: X2.1 14.95,74.175 17.9,74.175 17.95,74.125
  Bottom Layer w0.5: 17.95,74.125 25.48,74.125 U3.16 26.575,75.425 25.525,76.475 25.525,78.225 26.175,78.875 32.95,78.875 34.4,77.425 U3.10
NetU3_12: U3.12 X7.1 | length 13.8
  Top Layer w0.5: v1(31.875,77.3) 32.175,77 35.7,77 36.35,77.65 40.5,77.65 42.2,75.95 X7.1
  Bottom Layer w0.5: U3.12 31.875,75.44 v1(31.875,77.3)
NetU3_13: U3.13 X6.1 | length 12.5
  Bottom Layer w0.5: U3.13 30.59,72.86 31.6,71.85 38.625,71.85 X6.1
NetU3_14: U3.14 X5.1 | length 14.5
  Top Layer w0.5: v1(29.55,77.675) 29.55,76.75 30.7,75.6 35.7,75.6 36.375,76.275 38.85,76.275 X5.1
  Bottom Layer w0.5: U3.14 29.32,77.445 v1(29.55,77.675)
NetU5_1: 
NetU5_6: U5.6 X8.1 | length 9.2
  Bottom Layer w0.3: U5.6 41,81.498 41,74.125 X8.1
NetU5_7: U5.7 X4.1 | length 30.5
  Top Layer w0.5: X4.1 v1@36.775,72.925
  Bottom Layer w0.5: v1@36.775,72.925 38.2,74.35 38.2,77.2 39.843,78.843 U5.7
  other v1: 36.65,73.2
NetU5_8: U5.8 X3.1 | length 28.8
  Top Layer w0.5: X3.1@16.3,75.325 X3.1 17.475,75.425 18.45,74.45 36.325,74.45 v1@36.8,74.925
  Bottom Layer w0.5: v1@36.8,74.925 36.925,75.05 36.925,77.725 38.573,79.373 U5.8
  other v1: 36.9,74.975
NetU8_3: 
NetU8_7: 
NetU8_8: 
NetU11_5: 
NetU14_3: 
NetU14_4: 
NetU14_5: 
NetU14_6: 
NetU14_12: 
NetU14_13: 
NetU14_14: 
NetU15_3: 
NetU15_3: 
NetU15_3: 
NetU15_3: 
NetU15_5: 
NetU15_5: 
NetU15_5: 
NetU15_5: 
NetU15_5: 
NetU15_5: 
NetU15_7: 
NetU15_7: 
NetU15_9: 
NetU15_10: 
NetU15_15: 
NetU16_3: 
NetU16_4: 
NetU16_6: 
NetU19_4: 
NetU21_1: 
NetU21_2: 
NetU503_4: 
NetU700_4: 
NetX13_1: 
NetX15_1: 
NetX23_1: 
NetX32_1: 
NetX33_1: 
OFF1: 
OFF2: 
P0_0: 
P0_1: 
P0_2: 
P0_2: 
P0_2: 
P0_2: 
P0_2: 
P0_2: 
P0_3: 
P0_3: 
P0_3: 
P0_3: 
P0_3: 
P0_3: 
P0_3: 
P0_4: 
P0_5: 
P0_6: 
P0_7: 
P0_8: 
P0_8: 
P0_8: 
P0_8: 
P0_8: 
P0_8: 
P0_8: 
P0_8: 
P0_8: 
P0_8: 
P0_8: 
P0_8: 
P0_8: 
P0_8_: 
P0_8_: 
P0_8_: 
P0_9: 
P0_9: 
P0_9: 
P0_9_: 
P0_9_: 
P0_9_: 
P0_9_: 
P0_10: 
P0_11: 
P0_13: 
P0_15: 
P0_16: 
P0_17: 
P0_18: 
P0_19: 
P0_19: 
P0_20: 
P0_21: 
P0_23: 
P0_24: 
P0_25: 
P0_25: 
P0_25: 
P0_25: 
P0_25: 
P0_25: 
P0_25: 
P0_25: 
P0_25: 
P0_25: 
P0_25: 
P0_27: 
P0_27: 
P0_27: 
P0_27: 
P0_27: 
P0_27: 
P0_27: 
P0_27: 
P0_27: 
P0_27: 
P0_27: 
P0_27: 
P0_27: 
P0_28: 
P0_29: 
P0_30: 
P1_0: 
P1_1: 
P1_4: 
P1_8: 
P1_9: 
P1_10: 
P1_14: 
P1_15: 
P1_16: 
P1_17: 
P1_18: 
P1_19: 
P1_20: 
P1_21: 
P1_21: 
P1_22: 
P1_22: 
P1_22: 
P1_22: 
P1_22: 
P1_22: 
P1_22: 
P1_22: 
P1_23: 
P1_24: 
P1_25: 
P1_25: 
P1_25: 
P1_25: 
P1_25: 
P1_25: 
P1_26: 
P1_27: 
P1_28: 
P1_29: 
P1_29: 
P1_29: 
P1_29: 
P1_29: 
P1_30: 
P1_31: 
P1_31: 
P1_31: 
P1_31: 
P1_31: 
P1_31: 
P1_31: 
P1_31: 
P1_31: 
P1_31: 
P1_31: 
P1_31: 
P1_31: 
P1_31: 
P2_0: 
P2_1: 
P2_7: 
P2_8: 
P2_9: 
P2_10: 
P2_13: 
P3_25: 
P3_26: 
PB1: 
PB1: 
PB2: 
PB2: 
PB3: 
PB3: 
PE6: 
PE6: 
PE7: 
PQ3: 
PQ4: 
PQ5: 
PQ6: 
PROG0: 
PROG1: 
PROG1: 
PROG1: 
PWM: 
PWM1: 
PWM2: 
REL1: 
REL1: 
REL2: 
REL3: 
REL4: 
REL5: 
REL6: 
RES: 
RX: 
RXCAN: 
SK1: 
SK2: 
SK3: 
SK4: 
T3: 
T3: 
TD1: 
TX: 
U2: 
U5: 
U6: 
U7: 
U8: 
UAKB: 
UB1: 
UB2: 
UBM1: 
UBM2: 
UIB1: 
UIB2: 
ULOAD: 
US: 
US1: 
US1: 
US1: 
US1: 
US1: 
US1: 
US1: 
US1: 
US1: 
UU1: 
UU2: 
UU3: 
UU4: 
UU5: 
UU6: 
UU7: 
UU8: 
UU9: 
UU10: 
UU11: 
UU12: 
UU13: 
UU14: 
VBAT: 
VREF: 
VS: 
VS: 
pads on no net: CS1.0 J1.0 J1.4 J2.0 J2.6 J2.7 J2.8 J2.9 J2.10 J2.11 J2.12 J2.19 J2.20 J2.21 J2.22 J2.23 J2.24 J2.25 J2.26 J2.27 J2.28 J2.29 J2.30 J2.31 J2.32 J2.33 J2.34 J2.35 J2.36 J2.37 J2.38 J2.39 J2.40 J2.41 J2.42 J2.43 J2.44 J2.45 J2.46 J2.47 J2.48 J301.0 J301.7 J302.0 J302.7 JP1.9 JP1.10 JP2.1 JP2.2 JP2.3 JP2.4 JP5.5 JP5.6 JP5.7 JP5.10 U2.6 U2.8 U2.9 U2.10 U2.11 U2.12 U2.13 U2.14 U2.19 U2.22 U2.23 U2.24 U2.27 U2.28 U3.6 U3.11 U4.3
copper on no net:
  other v2: 77.875,83.625 44.6,83.875 11.325,85.3 77.875,85.625 44.6,85.875 11.325,87.3

## Polygon pours and split planes (outlines as drawn)
NetU700_4 on Top Layer (hatched 90Degree grid 0.1 track 0.3, remove dead copper): 212.3,67.65 212.3,53.85 216.05,50.1 216.05,12.3 223.6,4.75 223.6,1.15 231.45,1.15 231.45,3.8 237.5,9.85 237.5,29.3 242.95,34.75 247.55,39.35 247.55,68.05 212.25,68.05 212.25,67.5
GND_USB on Top Layer (hatched 90Degree grid 0.1 track 0.3, remove dead copper): 12.325,80 12.325,99.35 43.55,99.35 43.55,84.7 37.15,84.7 34.975,82.525 23.85,82.525 21.175,79.85 12.25,79.85
GND_USB on Bottom Layer (hatched 90Degree grid 0.1 track 0.3, remove dead copper): 12.325,80 12.325,99.3 43.525,99.3 43.525,85.45 36.95,85.45 33.325,81.825 24.75,81.825 22.975,80.05 22.85,79.925 12.325,79.925

## Keep-outs
Keep-Out Layer:
  circle w0.25: c11.8,121.25 r0
  circle w0.25: c11.8,121.25 r0
  circle w0.25: c11.8,121.25 r0
  circle w0.25: c11.8,121.25 r0
  circle w0.25: c11.8,121.25 r0
  circle w0.25: c11.8,121.25 r0
  circle w0.25: c11.8,121.25 r0
  circle w0.25: c11.8,121.25 r0
  circle w0.25: c2.25,16.875 r0
  lines w0.25: 4.024,16.88 cw(c4.019,16.88) 4.019,16.875 2.25,16.875 2.25,20.5 18.05,20.5 ; 8.15,10.5 33.75,10.5 33.75,20.5 18,20.5 ; 8.175,10.625 8.18,12.7 ; 10.3,69.025 10.35,68.975 ; 10.3,101.35 10.3,68.975 34.1,68.975 ; 10.35,101.35 45.625,101.35 45.625,93 78.85,93 78.85,68.975 30.2,68.975 ; 10.366,83.248 cw(c11.325,83.2) 12.284,83.253 ; 10.366,89.297 ccw(c11.325,89.35) 12.284,89.302 ; 12.3,71 12.3,99.35 43.55,99.35 43.55,71 42.3,71 ; 12.325,71 43.225,71 ; 43.6,88.025 43.6,88.025 ; 43.641,81.823 cw(c44.6,81.775) 45.559,81.828 ; 43.641,87.872 ccw(c44.6,87.925) 45.559,87.877 ; 45.625,91 45.625,71 76.825,71 ; 45.675,91 76.875,91 76.875,71 ; 76.916,81.573 cw(c77.875,81.525) 78.834,81.578 ; 76.916,87.622 ccw(c77.875,87.675) 78.834,87.627 ; 78.8,68.975 78.85,69.025 ; 89,10.7 89,101.5 ; 89,14.95 89,0 0,0 0,112.4 89,112.4 89,97.05 ; 53,20.375 45,20.375 45,23.975 78.875,23.975 78.875,20.275 71,20.275 71,6.5 53,6.5 53,20.375 ; 53,20.375 53,20.375 ; 10.325,89.45 10.325,89.45 ; 10.325,91.11 10.325,91.11 ; 43.6,89.685 43.6,89.685 ; 76.875,87.775 76.875,87.775 ; 76.875,89.435 76.875,89.435
  lines w0.254: 4.024,16.88 cw(c4,12.7) 8.18,12.7

## Silkscreen, mask and mechanical layers (free items; w line width, h text height)
Mechanical 1:
  circle w0.25: c92.3,22.4 r0
  circle w0.25: c92.3,22.4 r0
  circle w0.25: c97.2,9.825 r0
  lines w0.25: 14,72.375 63.975,72.375 ; 14,74.875 64.1,74.875 ; 14,98.375 63.825,98.375 ; 14,100.875 63.6,100.875 ; 18,106.325 18.025,106.3 20.35,106.3 20.35,104.675 ; 22.975,100.475 24.35,100.475 ; 23.375,99.9 23.375,101.1 ; 50.25,25.325 50.25,27.825 ; 60,69.925 60,103.3 ; 62.5,70.15 62.5,103.525 ; 73.75,25.35 73.75,27.85 ; 97.05,9.975 cw(c97.05,9.825) 97.2,9.825 ; 2.5,24.7 85.5,24.7 85.5,109.7 2.5,109.7 2.5,24.7 ; 6,27.7 82,27.7 82,106.7 6,106.7 6,27.7 ; 47.7,25.325 76.3,25.325 76.3,27.825 47.7,27.825 47.7,25.325 ; 53,6.5 71,6.5 71,22.5 53,22.5 53,6.5
  lines w0.3: 5.95,4.701 8.011,4.701 29.617,26.307 ; 5.951,4.552 8.013,4.552 29.618,26.158
Mechanical 2:
  circle w0.25: c69.25,7.525 r0
  circle w0.25: c69.925,21.475 r0
  lines w0.25: 38,20 38,30 ; 38,20.05 52.85,20.05 53,20.2 ; 38,30.025 53,30.025 ; 53,20 53,30 ; 54,21.5 54,7.5 70,7.5 70,21.5 ; 46.25,21.5 77.75,21.5 77.75,23 46.25,23 46.25,21.5

## Text inside footprints (layer, text, board x,y; h text height)
JP1: Top Overlay "1" at 37.184,24.068 h0.6 r90
JP2: Top Overlay "1" at 3.142,75.832 h0.6 r270
JP5: Top Overlay "1" at 18.318,105.792 h0.6